# Altium PCB DIO_RJ45_DIOT.PCBDOC (part 1 of 6)
Units mil, origin at the board's own origin, x right, y up, seen from the top; angles counter-clockwise.
Board outline 8758.72 x 3941.04 mil, 4 copper layers (TopLayer, MidLayer1, Internal Plane 1, BottomLayer), stack 46.562 mil thick; 318 components, 196 nets, 1276 pads, 687 vias.
Unrouted connection lines stored in the file: 2.
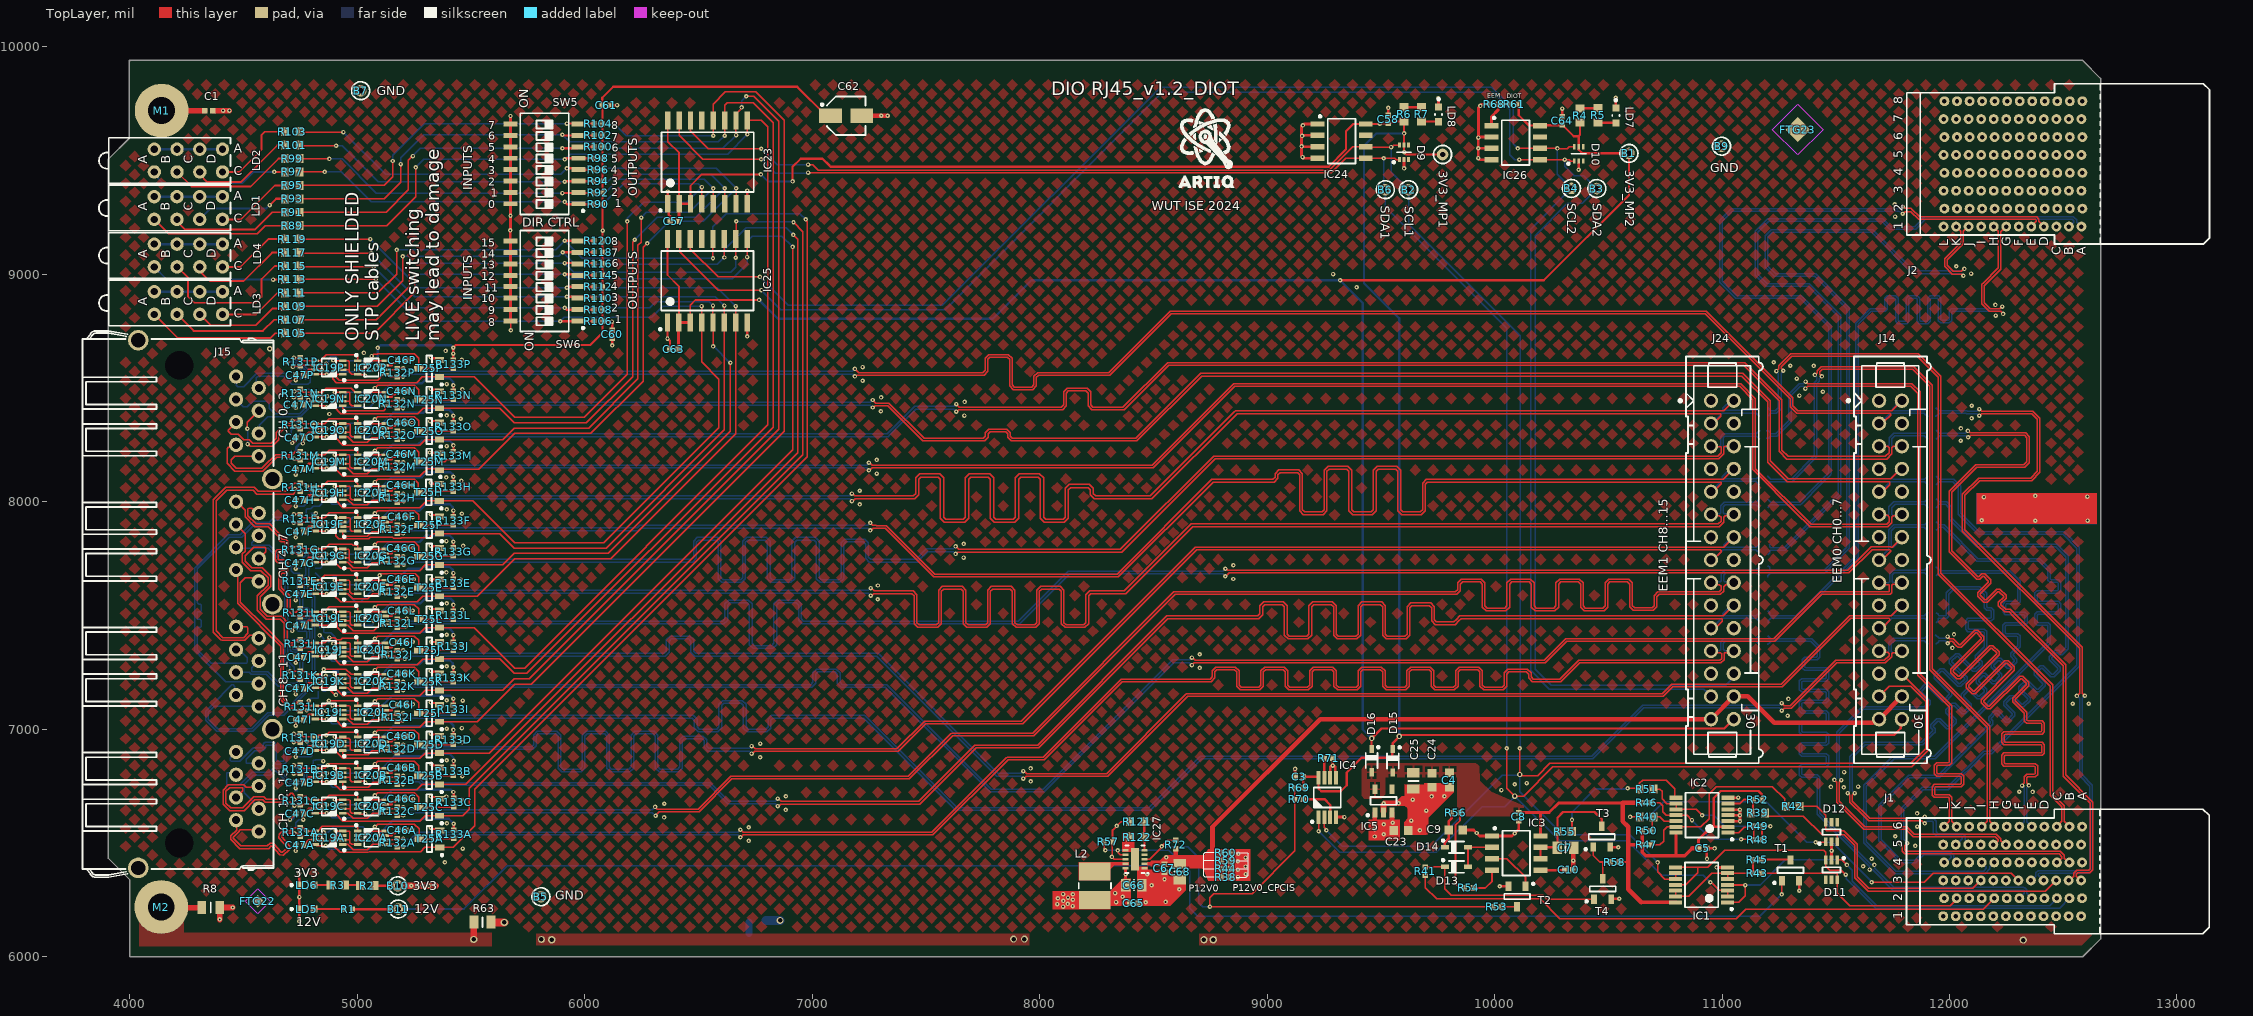
[diagram p0: TopLayer view]
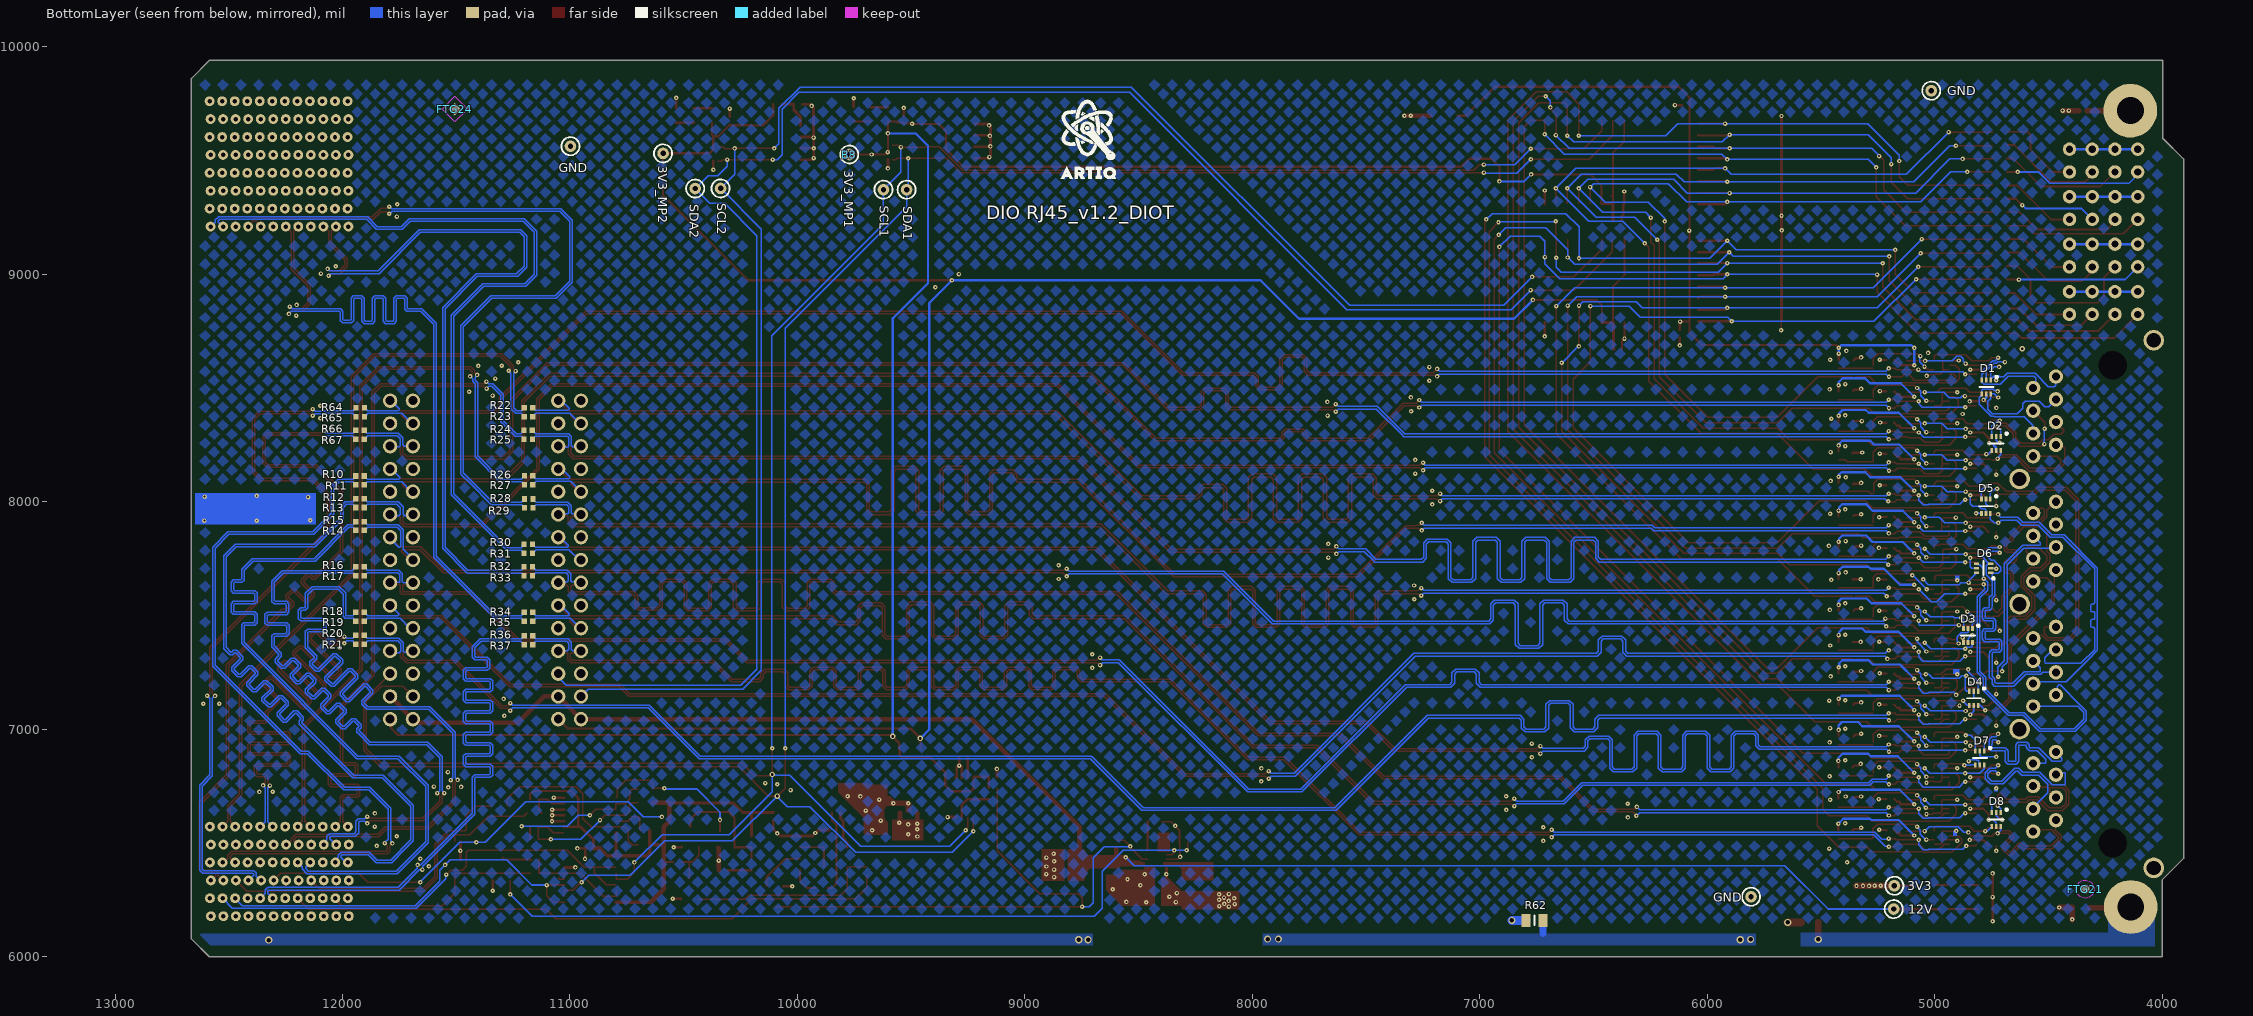
[diagram p1: BottomLayer view, seen from below]
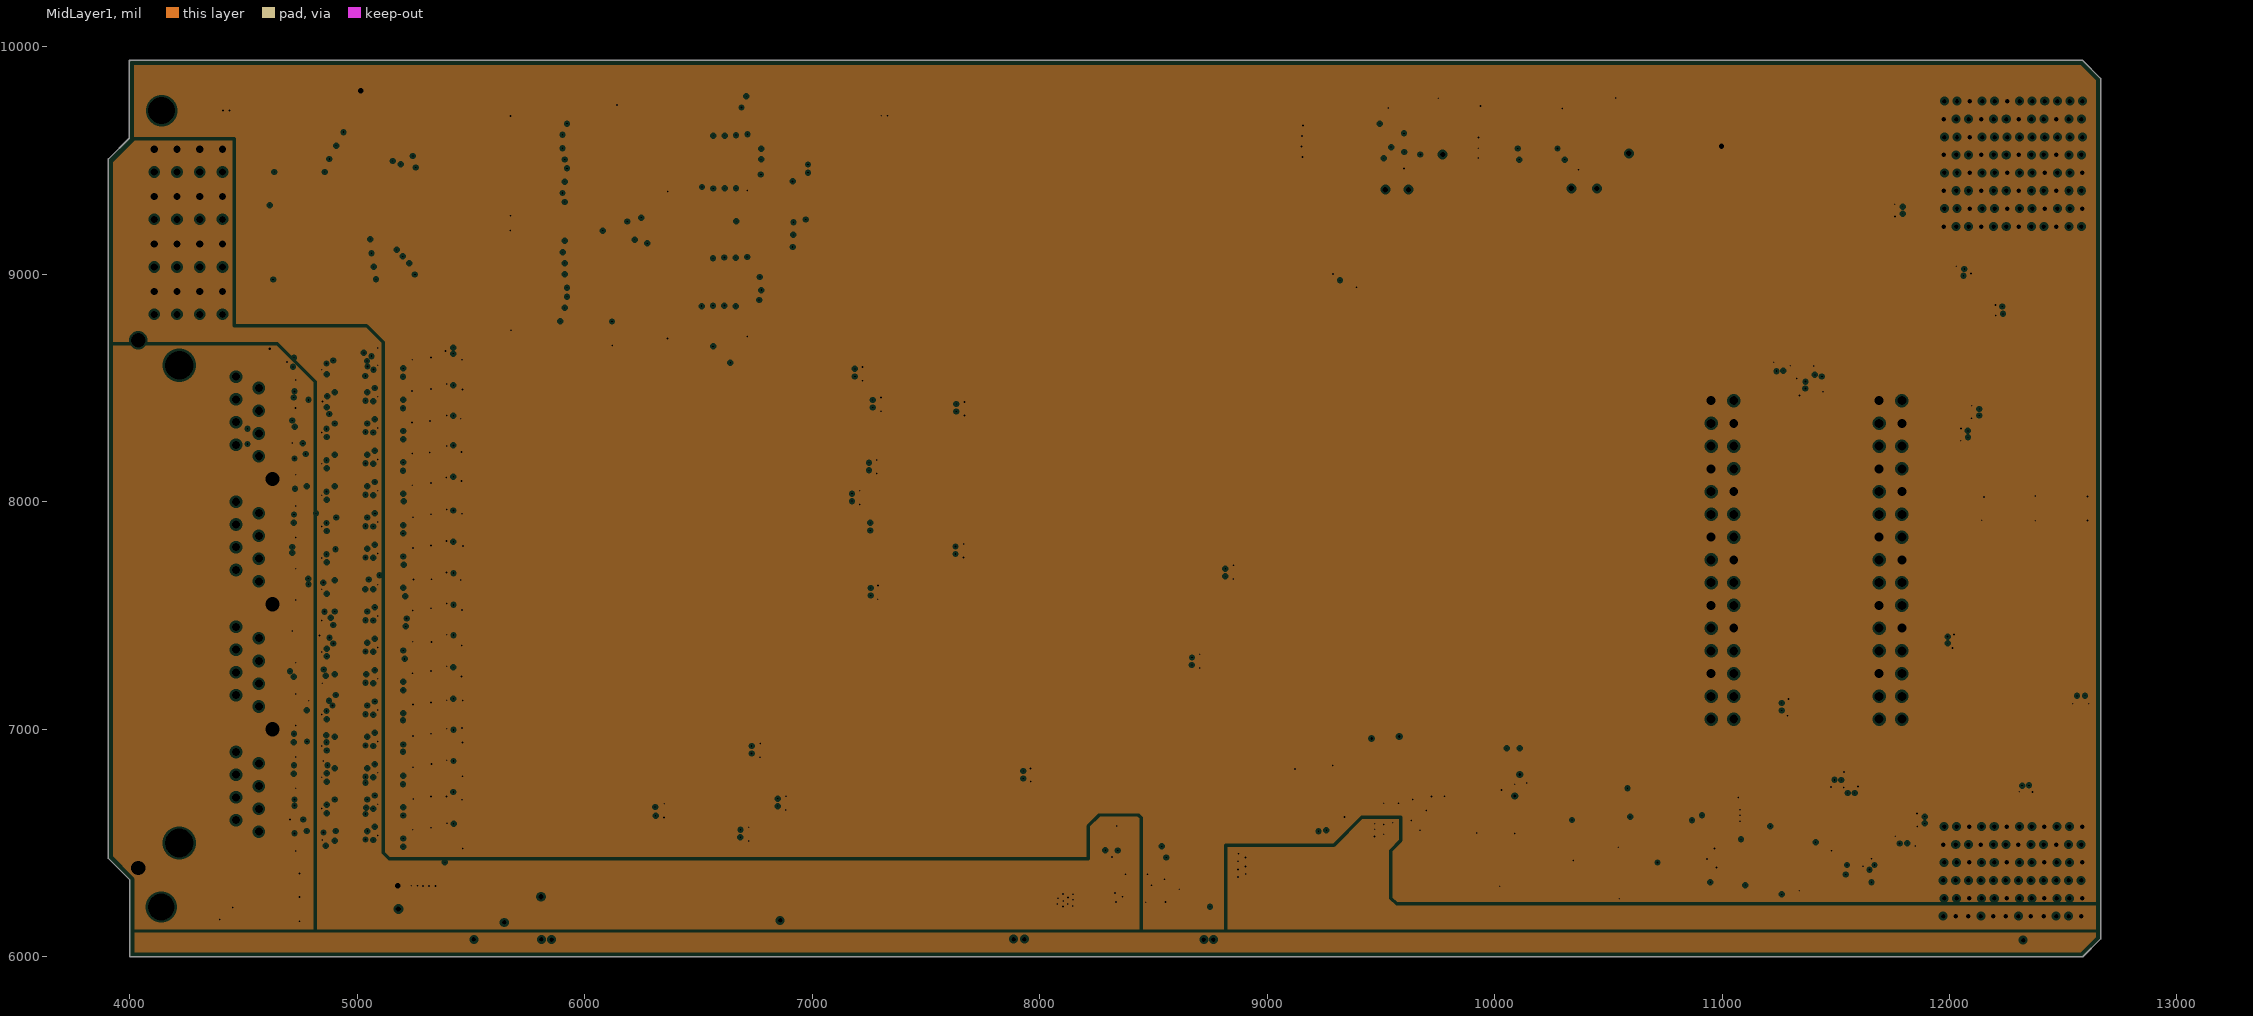
[diagram p2: MidLayer1, clearances drawn from the general rule]
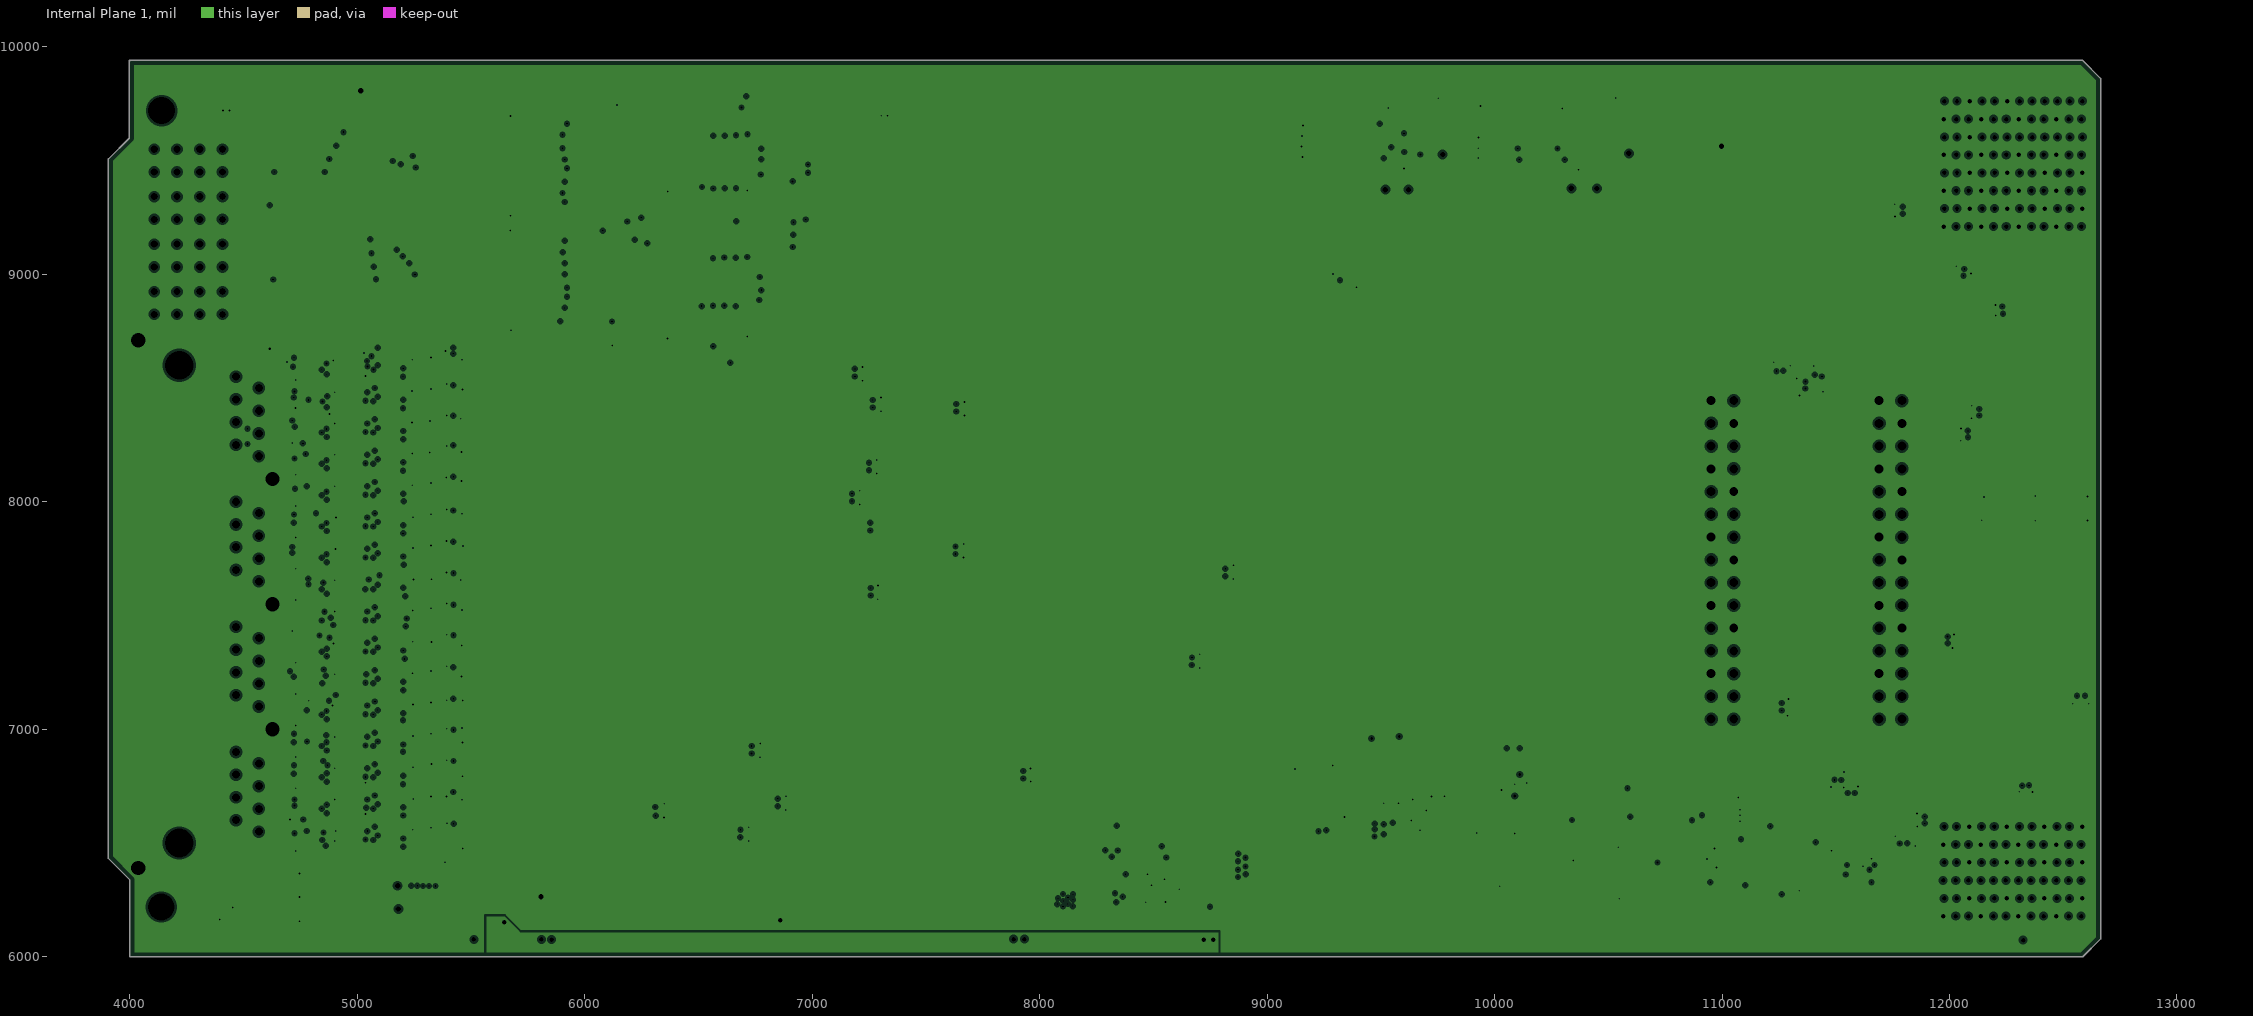
[diagram p3: Internal Plane 1, clearances drawn from the general rule]

## Layer stack, top to bottom
TopSolder: solder mask 2.087, Solder Resist, Dk 3.5
TopLayer: signal copper 1.4
Dielectric1: core 14.1728, FR-4, Dk 4.8
MidLayer1: plane copper 1.4, net (Multiple Nets)
Dielectric4: dielectric 12.6, FR-4, Dk 4.8
Internal Plane 1: plane copper 1.4169, net (Multiple Nets)
Dielectric2: core 14.1728, FR-4, Dk 4.2
BottomLayer: signal copper 1.4
BottomSolder: solder mask 2.087, Solder Resist, Dk 3.5

## Board outline
3906.25,9474.22 3906.25,9504.72 3906.84,9506.14 3998.02,9597.32 3998.02,9933.03 3999.8,9935 cw(c4000.01,9937.01) 4000.01,9939.02 12584.21,9939.02 12585.64,9938.43 12664.37,9859.71 12664.97,9858.28 12664.97,6078.73 12664.37,6077.3 12585.64,5998.58 12584.21,5997.98 4002.95,5997.98 4000.97,6000.35 4000.97,6306.73 4000.94,6307.09 4000.94,6336.76 3906.84,6430.86 3906.28,6432.64

## Design rules (kind name [scope] priority, off if disabled: settings)
AcuteAngle [All] p1: minimum=4.50000000000000E+0001 checktracksonly=FALSE
AssemblyTestPointUsage [All] p1 off:
AssemblyTestpoint [All] p1 off: testpointundercomponent=TRUE minsize=40 maxsize=100 preferedsize=60 minholesize=0 maxholesize=40 preferedholesize=32 testpointgrid=1 usegrid=TRUE gridtolerance=0.01 allowsidetop=TRUE allowsidebottom=TRUE
BoardOutlineClearance [All] p1: gap=15.75 ignorepadtopadclearanceinfootprint=FALSE
Clearance Clearance_copper_bal_bot [InNamedPolygon('copper_balance_bot')] p1: gap=5 ignorepadtopadclearanceinfootprint=FALSE
Clearance Clearance_copper_bal_top [InNamedPolygon('copper_balance_top')] p2: gap=5 ignorepadtopadclearanceinfootprint=FALSE
Clearance "Clearance FTG" [InComponent('FTG22') or InComponent('FTG23') or InComponent('FTG24')] p3: gap=0 ignorepadtopadclearanceinfootprint=TRUE
Clearance Clearance_diff_via [IsVia vs IsVia] p4: gap=5 ignorepadtopadclearanceinfootprint=FALSE
Clearance Clearance_outer [OnLayer('TopLayer') or OnLayer('BottomLayer')] p5: gap=5 ignorepadtopadclearanceinfootprint=TRUE
Clearance Clearance_inner [(OnLayer('MidLayer1'))] p6: gap=5 ignorepadtopadclearanceinfootprint=FALSE
ComponentClearance ComponentClearance_2 [InComponent('J15') or InComponent('ST1') or InComponent('LD1') or InComponent('LD2') or  InComponent('LD3') or InComponent('LD4')] p1: gap=0 collisioncheckmode=3 verticalgap=100000 showdistances=FALSE donotcheckwithout3dbody=TRUE
ComponentClearance [All] p2: gap=10 collisioncheckmode=3 verticalgap=10 showdistances=FALSE
DiffPairsRouting DiffPairsRouting_100_Ohm [InDifferentialPairClass('All Differential Pairs')] p1: maxlimit=10 minlimit=5 mostfreqgap=6 toplayer_minwidth=5 toplayer_maxwidth=6 toplayer_prefwidth=6 bottomlayer_minwidth=5 bottomlayer_maxwidth=6 bottomlayer_prefwidth=6 maxuncoupledlength=2000
FabricationTestPointUsage TestPointUsage [All] p1: valid=0 allowmultiple=FALSE
FabricationTestpoint Testpoint [All] p1: side=3 testpointundercomponent=TRUE minsize=40 maxsize=100 preferedsize=60 minholesize=20 maxholesize=40 preferedholesize=32 testpointgrid=1 allowsidetop=TRUE allowsidebottom=TRUE usegrid=TRUE gridtolerance=0.01
Height Height_1 [OnLayer('BottomLayer')] p1: minheight=0 maxheight=78.74 prefheight=39.37
Height [All] p2: minheight=0 maxheight=1000 prefheight=500
HoleSize [All] p1: absolutevalues=TRUE maxlimit=125.98 minlimit=5.91 maxpercent=80.000 minpercent=20.000
HoleToHoleClearance [All] p1: gap=5.91 allowstackedmicrovias=TRUE
MatchedLengths xSignals_RJ45_A_1 [InxSignalClass('LVDS_RJ45_A')] p1: tolerance=1000 checknetsindiffpair=FALSE checkdiffpairvsdiffpair=TRUE checkxsignals=TRUE checkothers=TRUE usedelayunits=TRUE delaytolerance=10.000000
MatchedLengths xSignals_RJ45_D_1 [InxSignalClass('LVDS_RJ45_D')] p2: tolerance=1000 checknetsindiffpair=FALSE checkdiffpairvsdiffpair=TRUE checkxsignals=TRUE checkothers=TRUE usedelayunits=TRUE delaytolerance=10.000000
MatchedLengths xSignals_RJ45_C_1 [InxSignalClass('LVDS_RJ45_C')] p3: tolerance=1000 checknetsindiffpair=FALSE checkdiffpairvsdiffpair=TRUE checkxsignals=TRUE checkothers=TRUE usedelayunits=TRUE delaytolerance=10.000000
MatchedLengths xSignals_RJ45_B_1 [InxSignalClass('LVDS_RJ45_B')] p4: tolerance=1000 checknetsindiffpair=FALSE checkdiffpairvsdiffpair=TRUE checkxsignals=TRUE checkothers=TRUE usedelayunits=TRUE delaytolerance=10.000000
MatchedLengths xSignals_RJ45_A_2 [InxSignalClass('LVDS_RJ45_A')] p5: tolerance=1000 checknetsindiffpair=TRUE checkdiffpairvsdiffpair=FALSE checkxsignals=FALSE checkothers=FALSE usedelayunits=TRUE delaytolerance=5.000000
MatchedLengths xSignals_RJ45_D_2 [InxSignalClass('LVDS_RJ45_D')] p6: tolerance=1000 checknetsindiffpair=TRUE checkdiffpairvsdiffpair=FALSE checkxsignals=FALSE checkothers=FALSE usedelayunits=TRUE delaytolerance=5.000000
MatchedLengths xSignals_RJ45_C_2 [InxSignalClass('LVDS_RJ45_C')] p7: tolerance=1000 checknetsindiffpair=TRUE checkdiffpairvsdiffpair=FALSE checkxsignals=FALSE checkothers=FALSE usedelayunits=TRUE delaytolerance=5.000000
MatchedLengths xSignals_RJ45_B_2 [InxSignalClass('LVDS_RJ45_B')] p8: tolerance=1000 checknetsindiffpair=TRUE checkdiffpairvsdiffpair=FALSE checkxsignals=FALSE checkothers=FALSE usedelayunits=TRUE delaytolerance=5.000000
MatchedLengths xSignals_EEM [InxSignalClass('EEM_LVDS')] p9: tolerance=1000 checknetsindiffpair=FALSE checkdiffpairvsdiffpair=TRUE checkxsignals=TRUE checkothers=TRUE usedelayunits=TRUE delaytolerance=10.000000
MatchedLengths xSignals_BP [InxSignalClass('BP_LVDS')] p10: tolerance=1000 checknetsindiffpair=FALSE checkdiffpairvsdiffpair=TRUE checkxsignals=TRUE checkothers=TRUE usedelayunits=TRUE delaytolerance=10.000000
MatchedLengths xSignals_BP_1 [InxSignalClass('BP_LVDS')] p11: tolerance=1000 checknetsindiffpair=TRUE checkdiffpairvsdiffpair=FALSE checkxsignals=FALSE checkothers=FALSE usedelayunits=TRUE delaytolerance=5.000000
MatchedLengths xSignals_EEM_1 [InxSignalClass('EEM_LVDS')] p12: tolerance=1000 checknetsindiffpair=TRUE checkdiffpairvsdiffpair=FALSE checkxsignals=FALSE checkothers=FALSE usedelayunits=TRUE delaytolerance=5.000000
MatchedLengths [InDifferentialPairClass('All Differential Pairs')] p13: tolerance=1000 checknetsindiffpair=TRUE checkdiffpairvsdiffpair=FALSE checkxsignals=FALSE checkothers=FALSE usedelayunits=TRUE delaytolerance=10.000000
MinimumSolderMaskSliver [All] p1: minsoldermaskwidth=3.94
ParallelSegment [All] p1 off: limit=196.85 gap=10
PasteMaskExpansion [All] p1 off: expansion=0
PlaneClearance [All] p1: clearance=10
PlaneConnect PlaneConnect_1 [HasCompParameterValue('PressFit', 'Yes')] p1: planeconnectstyle=Direct reliefexpansion=7.87 reliefentries=4 reliefconductorwidth=10 reliefairgap=10
PlaneConnect [All] p2: pad.planeconnectstyle=Relief pad.reliefexpansion=7.87 pad.reliefentries=4 pad.reliefconductorwidth=10 pad.reliefairgap=10 via.planeconnectstyle=Direct via.reliefexpansion=7.87 via.reliefentries=4 via.reliefconductorwidth=10 via.reliefairgap=5.91
PolygonConnect PolygonConnect_4 [All vs IsNamedPolygon('esd1')] p1: connectstyle=Direct reliefconductorwidth=10 reliefentries=4 polygonreliefangle="90 Angle" airgapwidth=10
PolygonConnect PolygonConnect_3 [HasFootprint('AMPHENOL_10052825-101LF')] p2: thpad.connectstyle=Direct thpad.reliefconductorwidth=10 thpad.reliefentries=4 thpad.polygonreliefangle="90 Angle" thpad.airgapwidth=10 smdpad.connectstyle=Relief smdpad.reliefconductorwidth=10 smdpad.reliefentries=4 smdpad.polygonreliefangle="90 Angle" smdpad.airgapwidth=10 via.connectstyle=Relief via.reliefconductorwidth=10 via.reliefentries=4 via.polygonreliefangle="90 Angle" via.airgapwidth=10
PolygonConnect PolygonConnect_1 [InPolygonClass('Direct')] p3: connectstyle=Direct reliefconductorwidth=10 reliefentries=2 polygonreliefangle="45 Angle" airgapwidth=10
PolygonConnect PolygonConnect_2 [InNetClass('PWR')] p4: thpad.connectstyle=Relief thpad.reliefconductorwidth=19.68 thpad.reliefentries=4 thpad.polygonreliefangle="90 Angle" thpad.airgapwidth=10 smdpad.connectstyle=Relief smdpad.reliefconductorwidth=19.68 smdpad.reliefentries=4 smdpad.polygonreliefangle="90 Angle" smdpad.airgapwidth=9.84 via.connectstyle=Direct via.reliefconductorwidth=10 via.reliefentries=2 via.polygonreliefangle="90 Angle" via.airgapwidth=10
PolygonConnect [All] p5: thpad.connectstyle=Relief thpad.reliefconductorwidth=10 thpad.reliefentries=4 thpad.polygonreliefangle="90 Angle" thpad.airgapwidth=10 smdpad.connectstyle=Relief smdpad.reliefconductorwidth=10 smdpad.reliefentries=4 smdpad.polygonreliefangle="90 Angle" smdpad.airgapwidth=10 via.connectstyle=Direct via.reliefconductorwidth=10 via.reliefentries=4 via.polygonreliefangle="90 Angle" via.airgapwidth=10
RoomDefinition U_LVDS_repeater16 [InComponentClass('U_LVDS_repeater16')] p1 off: confinementstyle=ConfineIn formatcopy=TRUE lockcomponents=FALSE outline 0,0 2000,0 2000,1000 0,1000
RoomDefinition U_LVDS_repeater15 [InComponentClass('U_LVDS_repeater15')] p2 off: confinementstyle=ConfineIn formatcopy=TRUE lockcomponents=FALSE outline 0,0 2000,0 2000,1000 0,1000
RoomDefinition U_LVDS_repeater14 [InComponentClass('U_LVDS_repeater14')] p3 off: confinementstyle=ConfineIn formatcopy=TRUE lockcomponents=FALSE outline 0,0 2000,0 2000,1000 0,1000
RoomDefinition U_LVDS_repeater13 [InComponentClass('U_LVDS_repeater13')] p4 off: confinementstyle=ConfineIn formatcopy=TRUE lockcomponents=FALSE outline 0,0 2000,0 2000,1000 0,1000
RoomDefinition U_LVDS_repeater12 [InComponentClass('U_LVDS_repeater12')] p5 off: confinementstyle=ConfineIn formatcopy=TRUE lockcomponents=FALSE outline 0,0 2000,0 2000,1000 0,1000
RoomDefinition U_LVDS_repeater11 [InComponentClass('U_LVDS_repeater11')] p6 off: confinementstyle=ConfineIn formatcopy=TRUE lockcomponents=FALSE outline 0,0 2000,0 2000,1000 0,1000
RoomDefinition U_LVDS_repeater10 [InComponentClass('U_LVDS_repeater10')] p7 off: confinementstyle=ConfineIn formatcopy=TRUE lockcomponents=FALSE outline 0,0 2000,0 2000,1000 0,1000
RoomDefinition U_LVDS_repeater9 [InComponentClass('U_LVDS_repeater9')] p8 off: confinementstyle=ConfineIn formatcopy=TRUE lockcomponents=FALSE outline 0,0 2000,0 2000,1000 0,1000
RoomDefinition U_LVDS_repeater8 [InComponentClass('U_LVDS_repeater8')] p9 off: confinementstyle=ConfineIn formatcopy=TRUE lockcomponents=FALSE outline 0,0 2000,0 2000,1000 0,1000
RoomDefinition U_LVDS_repeater7 [InComponentClass('U_LVDS_repeater7')] p10 off: confinementstyle=ConfineIn formatcopy=TRUE lockcomponents=FALSE outline 0,0 2000,0 2000,1000 0,1000
RoomDefinition U_LVDS_repeater6 [InComponentClass('U_LVDS_repeater6')] p11 off: confinementstyle=ConfineIn formatcopy=TRUE lockcomponents=FALSE outline 0,0 2000,0 2000,1000 0,1000
RoomDefinition U_LVDS_repeater5 [InComponentClass('U_LVDS_repeater5')] p12 off: confinementstyle=ConfineIn formatcopy=TRUE lockcomponents=FALSE outline 0,0 2000,0 2000,1000 0,1000
RoomDefinition U_LVDS_repeater4 [InComponentClass('U_LVDS_repeater4')] p13 off: confinementstyle=ConfineIn formatcopy=TRUE lockcomponents=FALSE outline 0,0 2000,0 2000,1000 0,1000
RoomDefinition U_LVDS_repeater3 [InComponentClass('U_LVDS_repeater3')] p14 off: confinementstyle=ConfineIn formatcopy=TRUE lockcomponents=FALSE outline 0,0 2000,0 2000,1000 0,1000
RoomDefinition U_LVDS_repeater2 [InComponentClass('U_LVDS_repeater2')] p15 off: confinementstyle=ConfineIn formatcopy=TRUE lockcomponents=FALSE outline 0,0 2000,0 2000,1000 0,1000
RoomDefinition U_LVDS_repeater1 [InComponentClass('U_LVDS_repeater1')] p16 off: confinementstyle=ConfineIn formatcopy=TRUE lockcomponents=FALSE outline 0,0 2000,0 2000,1000 0,1000
RoutingLayers RoutingLayers_1 [InAnyDifferentialPair] p1: top layer_v5=TRUE bottom layer_v5=TRUE
RoutingLayers RoutingLayers_2 [InNetClass('50Ohm')] p2: top layer_v5=TRUE bottom layer_v5=TRUE
RoutingLayers [All] p3: top layer_v5=TRUE bottom layer_v5=TRUE
RoutingVias [All] p1: holewidth=7.87 width=19.68 viastyle="Through Hole" minholewidth=7.87 minwidth=19.68 maxholewidth=20 maxwidth=40
SMDEntry [All] p1 off: side=TRUE corner=TRUE anyangle=FALSE
SilkToSilkClearance [All] p1: silktosilkclearance=5.91
SilkToSolderMaskClearance SilkscreenOverComponentPads [IsPad] p1: minsilkscreentomaskgap=0.7 clearancetoexposedcopper=FALSE
SolderMaskExpansion SolderMaskExpansion_1 [IsVia] p1 off: expansion=1.97 istentingtop=TRUE
SolderMaskExpansion [All] p2 off: expansion=1.97 istentingtop=FALSE
StubLength [All] p1: limit=118.11
SupplyNets "Schematic Supply Nets_2" [InNet('STRIP1')] p1: voltage=0.000
SupplyNets "Schematic Supply Nets_10" [InNet('P3V3_CPCIS')] p2 off: voltage=0.000
SupplyNets "Schematic Supply Nets_7" [InNet('P12V0_CPCIS')] p3 off: voltage=0.000
SupplyNets "Schematic Supply Nets_6" [InNet('GND')] p4 off: voltage=0.000
SupplyNets "Schematic Supply Nets_4" [InNet('P3V3')] p5 off: voltage=0.000
SupplyNets "Schematic Supply Nets_3" [InNet('P3V3_MP1')] p6 off: voltage=0.000
SupplyNets "Schematic Supply Nets_1" [InNet('P12V0')] p7 off: voltage=0.000
SupplyNets "Schematic Supply Nets" [InNet('P3V3_MP2')] p8 off: voltage=0.000
UnConnectedPin [All] p1 off:
UnRoutedNet UnRoutedNet_1 [Not InNet('STRIP1')] p2:
UnpouredPolygon UnpouredPolygon_1 [InPolygonClass('Copper_Balancing')] p1: allowunpoured=TRUE
UnpouredPolygon [All] p2:
ViasUnderSMD [All] p1: allowed=TRUE
Width Width_pwr [InNetClass('PWR')] p1: maxlimit=78.74 minlimit=5.98 preferedwidth=11.81 minimp=50.000000 maximp=50.000000 favimp=50.000000
Width Width_50Ohm [InNetClass('50Ohm')] p2: maxlimit=6.56 minlimit=6.56 preferedwidth=6.56 minimp=50.000000 maximp=50.000000 favimp=50.000000
Width [All] p3: maxlimit=78.74 minlimit=5.98 preferedwidth=5.98 minimp=50.000000 maximp=50.000000 favimp=50.000000
13 further rules are at their usual default settings.

## Classes and differential pairs
component class U_Supply: C3 C19 C20 C21 C22 C23 C24 C25 C60 C61 C62 C65 C66 C67 C68 D15 D16 IC4 IC5 IC27 L2 LD5 LD6 LD7 LD8 R1 R2 R3 R4 R5 R6 R7 R38 R44 R57 R59 R60 R69 R70 R71 R72 R121 R122
component class U_EEM_Connectors: C4 IC1 J14 J24 R10 R11 R12 R13 R14 R15 R16 R17 R18 R19 R20 R21 R22 R23 R24 R25 R26 R27 R28 R29 R30 R31 R32 R33 R34 R35 R36 R37 R64 R65 R66 R67
component class U_CPCIS_Connectors: C5 C7 C8 C9 C10 D11 D12 D13 D14 IC2 IC3 J1 J2 R39 R40 R41 R42 R43 R45 R46 R47 R48 R49 R50 R51 R52 R53 R54 R55 R56 R58 T1 T2 T3 T4
component class DIO45_TOP: C1 M1 M2 R8 R62 R63
channel class LVDS_repeater: U_LVDS_repeater1 U_LVDS_repeater2 U_LVDS_repeater3 U_LVDS_repeater4 U_LVDS_repeater5 U_LVDS_repeater6 U_LVDS_repeater7 U_LVDS_repeater8 U_LVDS_repeater9 U_LVDS_repeater10 U_LVDS_repeater11 U_LVDS_repeater12 U_LVDS_repeater13 U_LVDS_repeater14 U_LVDS_repeater15 U_LVDS_repeater16
component class U_LVDS_repeater16: C46P C47P IC19P IC20P R131P R132P R133P T25P
component class U_LVDS_repeater15: C46O C47O IC19O IC20O R131O R132O R133O T25O
component class U_LVDS_repeater14: C46N C47N IC19N IC20N R131N R132N R133N T25N
component class U_LVDS_repeater13: C46M C47M IC19M IC20M R131M R132M R133M T25M
component class U_LVDS_repeater12: C46L C47L IC19L IC20L R131L R132L R133L T25L
component class U_LVDS_repeater11: C46K C47K IC19K IC20K R131K R132K R133K T25K
component class U_LVDS_repeater10: C46J C47J IC19J IC20J R131J R132J R133J T25J
component class U_LVDS_repeater9: C46I C47I IC19I IC20I R131I R132I R133I T25I
component class U_LVDS_repeater8: C46H C47H IC19H IC20H R131H R132H R133H T25H
component class U_LVDS_repeater7: C46G C47G IC19G IC20G R131G R132G R133G T25G
component class U_LVDS_repeater6: C46F C47F IC19F IC20F R131F R132F R133F T25F
component class U_LVDS_repeater5: C46E C47E IC19E IC20E R131E R132E R133E T25E
component class U_LVDS_repeater4: C46D C47D IC19D IC20D R131D R132D R133D T25D
component class U_LVDS_repeater3: C46C C47C IC19C IC20C R131C R132C R133C T25C
component class U_LVDS_repeater2: C46B C47B IC19B IC20B R131B R132B R133B T25B
component class U_LVDS_repeater1: C46A C47A IC19A IC20A R131A R132A R133A T25A
component class U_Input: B1 B2 B3 B4 B5 B6 B7 B8 B9 B10 B11 C57 C58 C63 C64 D1 D2 D3 D4 D5 D6 D7 D8 D9 D10 FTG21 FTG22 FTG23 FTG24 IC23 IC24 IC25 IC26 J15 LD1 LD2 LD3 LD4 R61 R68 R89 R90 R91 R92 R93 R94 R95 R96 R97 R98 R99 R100 R101 R102 R103 R104 R105 R106 R107 R108 R109 R110 R111 R112 R113 R114 R115 R116 R117 R118 R119 R120 SW5 SW6
differential pair BP_IO.BP_LVDS15: +BP_IO.BP_LVDS15_P -BP_IO.BP_LVDS15_N
differential pair BP_IO.BP_LVDS14: +BP_IO.BP_LVDS14_P -BP_IO.BP_LVDS14_N
differential pair BP_IO.BP_LVDS13: +BP_IO.BP_LVDS13_P -BP_IO.BP_LVDS13_N
differential pair BP_IO.BP_LVDS12: +BP_IO.BP_LVDS12_P -BP_IO.BP_LVDS12_N
differential pair BP_IO.BP_LVDS11: +BP_IO.BP_LVDS11_P -BP_IO.BP_LVDS11_N
differential pair BP_IO.BP_LVDS10: +BP_IO.BP_LVDS10_P -BP_IO.BP_LVDS10_N
differential pair BP_IO.BP_LVDS9: +BP_IO.BP_LVDS9_P -BP_IO.BP_LVDS9_N
differential pair BP_IO.BP_LVDS8: +BP_IO.BP_LVDS8_P -BP_IO.BP_LVDS8_N
differential pair BP_IO.BP_LVDS7: +BP_IO.BP_LVDS7_P -BP_IO.BP_LVDS7_N
differential pair BP_IO.BP_LVDS6: +BP_IO.BP_LVDS6_P -BP_IO.BP_LVDS6_N
differential pair BP_IO.BP_LVDS5: +BP_IO.BP_LVDS5_P -BP_IO.BP_LVDS5_N
differential pair BP_IO.BP_LVDS4: +BP_IO.BP_LVDS4_P -BP_IO.BP_LVDS4_N
differential pair BP_IO.BP_LVDS3: +BP_IO.BP_LVDS3_P -BP_IO.BP_LVDS3_N
differential pair BP_IO.BP_LVDS2: +BP_IO.BP_LVDS2_P -BP_IO.BP_LVDS2_N
differential pair BP_IO.BP_LVDS1: +BP_IO.BP_LVDS1_P -BP_IO.BP_LVDS1_N
differential pair BP_IO.BP_LVDS0: +BP_IO.BP_LVDS0_P -BP_IO.BP_LVDS0_N
differential pair LVDS15: +LVDS15_P -LVDS15_N
differential pair LVDS0: +LVDS0_P -LVDS0_N
differential pair LVDS2: +LVDS1_P -LVDS1_N
differential pair LVDS3: +LVDS2_P -LVDS2_N
differential pair LVDS4: +LVDS3_P -LVDS3_N
differential pair LVDS5: +LVDS4_P -LVDS4_N
differential pair LVDS6: +LVDS5_P -LVDS5_N
differential pair LVDS7: +LVDS6_P -LVDS6_N
differential pair LVDS8: +LVDS7_P -LVDS7_N
differential pair LVDS10: +LVDS9_P -LVDS9_N
differential pair LVDS11: +LVDS10_P -LVDS10_N
differential pair LVDS12: +LVDS11_P -LVDS11_N
differential pair LVDS13: +LVDS12_P -LVDS12_N
differential pair LVDS14: +LVDS13_P -LVDS13_N
differential pair LVDS15: +LVDS14_P -LVDS14_N
differential pair LVDS_IOAA: +LVDS_IOAA_P -LVDS_IOAA_N
differential pair LVDS_IOAB: +LVDS_IOAB_P -LVDS_IOAB_N
differential pair LVDS_IOAC: +LVDS_IOAC_P -LVDS_IOAC_N
differential pair LVDS_IOAD: +LVDS_IOAD_P -LVDS_IOAD_N
differential pair LVDS_IOAE: +LVDS_IOAE_P -LVDS_IOAE_N
differential pair LVDS_IOAF: +LVDS_IOAF_P -LVDS_IOAF_N
differential pair LVDS_IOAG: +LVDS_IOAG_P -LVDS_IOAG_N
differential pair LVDS_IOAH: +LVDS_IOAH_P -LVDS_IOAH_N
differential pair LVDS_IOAI: +LVDS_IOAI_P -LVDS_IOAI_N
differential pair LVDS_IOAJ: +LVDS_IOAJ_P -LVDS_IOAJ_N
differential pair LVDS_IOAK: +LVDS_IOAK_P -LVDS_IOAK_N
differential pair LVDS_IOAL: +LVDS_IOAL_P -LVDS_IOAL_N
differential pair LVDS_IOAM: +LVDS_IOAM_P -LVDS_IOAM_N
differential pair LVDS_IOAN: +LVDS_IOAN_P -LVDS_IOAN_N
differential pair LVDS_IOAO: +LVDS_IOAO_P -LVDS_IOAO_N
differential pair LVDS_IOAP: +LVDS_IOAP_P -LVDS_IOAP_N
differential pair LVDS9: +LVDS8_P -LVDS8_N

## Components (designator, comment, footprint, x,y, rotation, side; value= is the part's Value field where it differs from the comment)
B1 "Plated Hole" c130h60 10590.85,9530.51 r0 top
B2 "Plated Hole" c130h60 9621.98,9371.06 r0 top
B3 "Plated Hole" c130h60 10449.8,9375.98 r0 top
B4 "Plated Hole" c130h60 10338.09,9376.48 r0 top
B5 "Plated Hole" c130h60 5808.07,6262.8 r0 top
B6 "Plated Hole" c130h60 9520.24,9371.06 r0 top
B7 "Plated Hole" c130h60 5015.75,9806.1 r0 top
B8 "Plated Hole" c130h60 9771.65,9525.59 r180 bottom
B9 "Plated Hole" c130h60 10998.03,9562.01 r0 top
B10 "Plated Hole" c130h60 5178.15,6311.02 r0 top
B11 "Plated Hole" c130h60 5181.1,6208.66 r0 top
C1 "22pF" CAPC1005X55N 4347.85,9718.5 r0 top
C3 "100nF" CAPC1005X55N 9140.75,6790.35 r0 top
C4 "100nF" CAPC1608X87N 9801.18,6775.59 r90 top
C5 "100nF" CAPC1005X55N 10914.37,6476.38 r180 top
C7 "22uF" CAPC2012X135N 10312.01,6478.35 r180 top
C8 "100nF" CAPC1005X55N 10106.33,6615.06 r90 top
C9 "1uF" CAPC1608X87N 9829.7,6556.07 r180 top
C10 "100nF" CAPC1005X55N 10325.79,6380.91 r180 top
C23 "1uF" CAPC1608X87N 9588.58,6553.15 r180 top
C24 "1uF" CAPC1608X87N 9725.39,6774.61 r90 top
C25 "22uF" CAPC2012X135N 9643.7,6771.65 r90 top
C46A "100nF" CAPC1005X55N 5196.13,6555.04 r180 top (schematic designator C46)
C46B "100nF" CAPC1005X55N 5196.13,6830.63 r180 top (schematic designator C46)
C46C "100nF" CAPC1005X55N 5196.13,6692.83 r180 top (schematic designator C46)
C46D "100nF" CAPC1005X55N 5196.13,6968.43 r180 top (schematic designator C46)
C46E "100nF" CAPC1005X55N 5196.13,7657.4 r180 top (schematic designator C46)
C46F "100nF" CAPC1005X55N 5196.13,7932.99 r180 top (schematic designator C46)
C46G "100nF" CAPC1005X55N 5196.13,7795.2 r180 top (schematic designator C46)
C46H "100nF" CAPC1005X55N 5196.13,8070.79 r180 top (schematic designator C46)
C46I "100nF" CAPC1005X55N 5196.13,7106.22 r180 top (schematic designator C46)
C46J "100nF" CAPC1005X55N 5196.13,7381.81 r180 top (schematic designator C46)
C46K "100nF" CAPC1005X55N 5196.13,7244.02 r180 top (schematic designator C46)
C46L "100nF" CAPC1005X55N 5196.13,7519.61 r180 top (schematic designator C46)
C46M "100nF" CAPC1005X55N 5196.13,8208.58 r180 top (schematic designator C46)
C46N "100nF" CAPC1005X55N 5196.13,8484.17 r180 top (schematic designator C46)
C46O "100nF" CAPC1005X55N 5196.13,8346.38 r180 top (schematic designator C46)
C46P "100nF" CAPC1005X55N 5196.13,8621.97 r180 top (schematic designator C46)
C47A "100nF" CAPC1005X55N 4747.13,6489.2 r0 top (schematic designator C47)
C47B "100nF" CAPC1005X55N 4747.13,6764.79 r0 top (schematic designator C47)
C47C "100nF" CAPC1005X55N 4747.13,6626.99 r0 top (schematic designator C47)
C47D "100nF" CAPC1005X55N 4747.13,6902.58 r0 top (schematic designator C47)
C47E "100nF" CAPC1005X55N 4747.13,7591.56 r0 top (schematic designator C47)
C47F "100nF" CAPC1005X55N 4747.13,7867.15 r0 top (schematic designator C47)
C47G "100nF" CAPC1005X55N 4747.13,7729.35 r0 top (schematic designator C47)
C47H "100nF" CAPC1005X55N 4747.13,8004.94 r0 top (schematic designator C47)
C47I "100nF" CAPC1005X55N 4747.13,7040.38 r0 top (schematic designator C47)
C47J "100nF" CAPC1005X55N 4747.13,7315.97 r0 top (schematic designator C47)
C47K "100nF" CAPC1005X55N 4747.13,7178.17 r0 top (schematic designator C47)
C47L "100nF" CAPC1005X55N 4747.13,7453.76 r0 top (schematic designator C47)
C47M "100nF" CAPC1005X55N 4747.13,8142.74 r0 top (schematic designator C47)
C47N "100nF" CAPC1005X55N 4744.09,8424.89 r0 top (schematic designator C47)
C47O "100nF" CAPC1005X55N 4747.13,8280.54 r0 top (schematic designator C47)
C47P "100nF" CAPC1005X55N 4747.13,8556.13 r0 top (schematic designator C47)
C57 "100nF" CAPC1005X55N 6394.69,9231.3 r0 top
C58 "100nF" CAPC1005X55N 9533.46,9680.12 r270 top
C60 "100nF" CAPC1005X55N 6121.06,8736.22 r90 top
C61 "100nF" CAPC1005X55N 6095.47,9741.14 r180 top
C62 "10uF" CAPAE430X540N 7149.61,9695.87 r0 top
C63 "100nF" CAPC1005X55N 6392.72,8669.29 r0 top
C64 "100nF" CAPC1005X55N 10298.23,9674.21 r270 top
C65 "100nF" CAPC1005X55N 8414.92,6234.54 r180 top
C66 "22uF" CAPC2012X135N 8414.92,6313.99 r180 top
C67 "100nF" CAPC1005X55N 8549.21,6388.78 r90 top
C68 "22uF" CAPC2012X135N 8616.14,6373.03 r90 top
D1 "NUP4114UPXV6T1G" SOTFL50P160X60-6N 4773.62,8503.94 r270 bottom
D2 "NUP4114UPXV6T1G" SOTFL50P160X60-6N 4730.13,8255.54 r270 bottom
D3 "NUP4114UPXV6T1G" SOTFL50P160X60-6N 4854.33,7411.42 r270 bottom
D4 "NUP4114UPXV6T1G" SOTFL50P160X60-6N 4828.74,7134.84 r270 bottom
D5 "NUP4114UPXV6T1G" SOTFL50P160X60-6N 4775.59,7979.33 r270 bottom
D6 "NUP4114UPXV6T1G" SOTFL50P160X60-6N 4785.62,7707.23 r0 bottom
D7 "NUP4114UPXV6T1G" SOTFL50P160X60-6N 4802.17,6873.03 r270 bottom
D8 "NUP4114UPXV6T1G" SOTFL50P160X60-6N 4730.13,6601.99 r270 bottom
D9 "NUP4114UPXV6T1G" SOTFL50P160X60-6N 9602.36,9535.43 r90 top
D10 "NUP4114UPXV6T1G" SOTFL50P160X60-6N 10370.08,9528.54 r90 top
D11 "PESD3V3L5UY" SOT65P210X110-6N 11481.3,6380.91 r270 top
D12 "PESD3V3L5UY" SOT65P210X110-6N 11481.3,6547.24 r90 top
D13 "BAT165" SOD2512X110N 9832.65,6393.67 r0 top
D14 "BAT165" SOD2512X110N 9832.65,6480.28 r0 top
D15 "BAT165" SOD2512X110N 9553.15,6860.24 r270 top
D16 "BAT165" SOD2512X110N 9459.65,6861.22 r270 top
FTG21 "Use only in PCB" FIDUCIAL_TOP_C100-200 4339.57,6296.13 r90 bottom
FTG22 "Use only in PCB" FIDUCIAL_TOP_S100-200 4562.99,6243.11 r90 top
FTG23 "Use only in PCB" FIDUCIAL_TOP_S200-400 11333.66,9634.84 r0 top locked
FTG24 "Use only in PCB" FIDUCIAL_TOP_S100-200 11505.91,9725.39 r90 bottom
IC1 "74HC4066PW" SOP65P640X110-14N 10910.43,6314.96 r180 top
IC2 "74HC4066PW" SOP65P640X110-14N 10912.4,6621.06 r180 top
IC3 "TLC555ID" SOIC127P600X175-8N 10095.47,6454.72 r0 top
IC4 "LM75AIMM/NOPB" SOP65P490X109-8N 9264.76,6698.82 r90 top
IC5 "MIC5219-3.3YM5" SOT95P280X145-5N 9511.81,6684.06 r90 top
IC19A "FIN1101K8X" SOP50P310X90-8N 4876.13,6522.04 r180 top (schematic designator IC19)
IC19B "FIN1101K8X" SOP50P310X90-8N 4876.13,6797.63 r180 top (schematic designator IC19)
IC19C "FIN1101K8X" SOP50P310X90-8N 4876.13,6659.83 r180 top (schematic designator IC19)
IC19D "FIN1101K8X" SOP50P310X90-8N 4876.13,6935.43 r180 top (schematic designator IC19)
IC19E "FIN1101K8X" SOP50P310X90-8N 4876.13,7624.4 r180 top (schematic designator IC19)
IC19F "FIN1101K8X" SOP50P310X90-8N 4876.13,7899.99 r180 top (schematic designator IC19)
IC19G "FIN1101K8X" SOP50P310X90-8N 4876.13,7762.2 r180 top (schematic designator IC19)
IC19H "FIN1101K8X" SOP50P310X90-8N 4876.13,8037.79 r180 top (schematic designator IC19)
IC19I "FIN1101K8X" SOP50P310X90-8N 4876.13,7073.22 r180 top (schematic designator IC19)
IC19J "FIN1101K8X" SOP50P310X90-8N 4876.13,7348.81 r180 top (schematic designator IC19)
IC19K "FIN1101K8X" SOP50P310X90-8N 4876.13,7211.02 r180 top (schematic designator IC19)
IC19L "FIN1101K8X" SOP50P310X90-8N 4876.13,7486.61 r180 top (schematic designator IC19)
IC19M "FIN1101K8X" SOP50P310X90-8N 4876.13,8175.58 r180 top (schematic designator IC19)
IC19N "FIN1101K8X" SOP50P310X90-8N 4876.13,8451.17 r180 top (schematic designator IC19)
IC19O "FIN1101K8X" SOP50P310X90-8N 4876.13,8313.38 r180 top (schematic designator IC19)
IC19P "FIN1101K8X" SOP50P310X90-8N 4876.13,8588.97 r180 top (schematic designator IC19)
IC20A "FIN1101K8X" SOP50P310X90-8N 5063.13,6522.04 r0 top (schematic designator IC20)
IC20B "FIN1101K8X" SOP50P310X90-8N 5063.13,6797.63 r0 top (schematic designator IC20)
IC20C "FIN1101K8X" SOP50P310X90-8N 5063.13,6659.83 r0 top (schematic designator IC20)
IC20D "FIN1101K8X" SOP50P310X90-8N 5063.13,6935.43 r0 top (schematic designator IC20)
IC20E "FIN1101K8X" SOP50P310X90-8N 5063.13,7624.4 r0 top (schematic designator IC20)
IC20F "FIN1101K8X" SOP50P310X90-8N 5063.13,7899.99 r0 top (schematic designator IC20)
IC20G "FIN1101K8X" SOP50P310X90-8N 5063.13,7762.2 r0 top (schematic designator IC20)
IC20H "FIN1101K8X" SOP50P310X90-8N 5063.13,8037.79 r0 top (schematic designator IC20)
IC20I "FIN1101K8X" SOP50P310X90-8N 5063.13,7073.22 r0 top (schematic designator IC20)
IC20J "FIN1101K8X" SOP50P310X90-8N 5063.13,7348.81 r0 top (schematic designator IC20)
IC20K "FIN1101K8X" SOP50P310X90-8N 5063.13,7211.02 r0 top (schematic designator IC20)
IC20L "FIN1101K8X" SOP50P310X90-8N 5063.13,7486.61 r0 top (schematic designator IC20)
IC20M "FIN1101K8X" SOP50P310X90-8N 5063.13,8175.58 r0 top (schematic designator IC20)
IC20N "FIN1101K8X" SOP50P310X90-8N 5063.13,8451.17 r0 top (schematic designator IC20)
IC20O "FIN1101K8X" SOP50P310X90-8N 5063.13,8313.38 r0 top (schematic designator IC20)
IC20P "FIN1101K8X" SOP50P310X90-8N 5063.13,8588.97 r0 top (schematic designator IC20)
IC23 "PCF8574ADW" SOIC127P1030X265-16N 6540.35,9492.13 r90 top
IC24 "24AA025E48-I/SN" SOIC127P600X175-8N 9327.76,9584.65 r0 top
IC25 "PCF8574ADW" SOIC127P1030X265-16N 6539.37,8970.47 r90 top
IC26 "24AA025E48-I/SN" SOIC127P600X175-8N 10092.81,9577.76 r0 top
IC27 "TPS62175DQC" SON50P200X300X80-11N-R94X250 8419.6,6427.46 r180 top
J1 "" AMPHENOL_10052825-101LF 12277.56,6374.02 r90 top
J2 "" AMPHENOL_10052838-101LF 12279.08,9484.31 r90 top
J14 "" 3M_N2530-6002RB 11740.65,7743.36 r270 top
J15 "RJ45" TYCO_5406203-3 4517.72,7549.21 r90 top locked
J24 "" 3M_N2530-6002RB 11001.67,7743.33 r270 top
L2 "10uH" IND_MURATA-PS_8400 8243.11,6311.02 r270 top
LD1 "Green" LED_BIVAR_H485CGDL 4257.87,9290.35 r0 top locked
LD2 "Green" LED_BIVAR_H485CGDL 4258.27,9498.82 r0 top locked
LD3 "Green" LED_BIVAR_H485CGDL 4258.34,8872.77 r0 top locked
LD4 "Green" LED_BIVAR_H485CGDL 4258.27,9081.5 r0 top locked
LD5 "Green" LED_KINGBRIGHT_KPH-1608CGCK 4778.54,6208.66 r0 top
LD6 "Green" LED_KINGBRIGHT_KPH-1608CGCK 4778.54,6313.98 r0 top
LD7 "Green" LED_KINGBRIGHT_KPH-1608CGCK 10533.46,9696.85 r270 top
LD8 "Green" LED_KINGBRIGHT_KPH-1608CGCK 9753.94,9701.77 r270 top
M1 "Plated Hole" MTG300_600 4140.55,9718.5 r0 top
M2 "Plated Hole" MTG300_600 4139.08,6217.52 r0 top
R1 "10k" RESC1005X40N 4960.63,6208.66 r0 top
R2 "220" RESC1608X55N 5045.28,6312.01 r180 top
R3 "220" RESC1608X55N 4915.35,6313.98 r180 top
R4 "220" RESC1608X55N 10375.98,9696.85 r90 top
R5 "220" RESC1608X55N 10455.71,9697.83 r270 top
R6 "220" RESC1608X55N 9602.36,9701.77 r90 top
R7 "220" RESC1608X55N 9679.13,9701.77 r270 top
R8 "1M1" RESC2012X60N 4356.88,6215.43 r0 top
R10 "0" RESC1005X35N 11922.94,8112.23 r180 bottom
R11 "0" RESC1005X35N 11922.94,8073.13 r180 bottom
R12 "0" RESC1005X35N 11922.94,8012.84 r180 bottom
R13 "0" RESC1005X35N 11922.94,7973.76 r180 bottom
R14 "0" RESC1005X35N 11922.94,7873.02 r180 bottom
R15 "0" RESC1005X35N 11922.94,7911.8 r180 bottom
R16 "0" RESC1005X35N 11922.94,7712.66 r180 bottom
R17 "0" RESC1005X35N 11922.94,7673.29 r180 bottom
R18 "0" RESC1005X35N 11922.94,7512.85 r180 bottom
R19 "0" RESC1005X35N 11922.94,7473.48 r180 bottom
R20 "0" RESC1005X35N 11922.94,7412.89 r180 bottom
R21 "0" RESC1005X35N 11922.94,7373.09 r180 bottom
R22 "0" RESC1005X35N 11182.5,8412.93 r180 bottom
R23 "0" RESC1005X35N 11182.5,8373.56 r180 bottom
R24 "0" RESC1005X35N 11184.38,8312.78 r180 bottom
R25 "0" RESC1005X35N 11183.4,8273.41 r180 bottom
R26 "0" RESC1005X35N 11182.09,8112.48 r180 bottom
R27 "0" RESC1005X35N 11182.09,8073.11 r180 bottom
R28 "0" RESC1005X35N 11181.57,8011.24 r180 bottom
R29 "0" RESC1005X35N 11181.57,7971.82 r180 bottom
R30 "0" RESC1005X35N 11183.07,7812.01 r180 bottom
R31 "0" RESC1005X35N 11183.07,7772.64 r180 bottom
R32 "0" RESC1005X35N 11183.39,7712.86 r180 bottom
R33 "0" RESC1005X35N 11183.39,7673.49 r180 bottom
R34 "0" RESC1005X35N 11182.56,7512.42 r180 bottom
R35 "0" RESC1005X35N 11182.56,7473.77 r180 bottom
R36 "0" RESC1005X35N 11182.56,7409.88 r180 bottom
R37 "0" RESC1005X35N 11182.56,7371.06 r180 bottom
R38 "0" RESC1005X35N 8818.9,6349.41 r0 top
R39 "33" RESC1608X55N 11157.48,6630.91 r180 top
R40 "33" RESC1608X55N 10668.31,6613.68 r0 top
R41 "33" RESC1005X40N 9695.87,6375 r270 top
R42 "33" RESC1608X55N 11310.04,6659.45 r180 top
R43 "33" RESC1005X40N 11154.53,6366.14 r0 top
R44 "0" RESC1005X35N 8818.9,6384.84 r0 top
R45 "200" RESC1005X40N 11154.53,6426.18 r180 top
R46 "10k" RESC1005X40N 10668.31,6674.95 r180 top
R47 "10k" RESC1005X40N 10668.31,6491.14 r0 top
R48 "10k" RESC1005X40N 11157.48,6512.8 r0 top
R49 "10k" RESC1005X40N 11157.48,6571.85 r0 top
R50 "10k" RESC1005X40N 10668.31,6552.41 r0 top
R51 "2k7" RESC1608X55N 10668.31,6736.22 r0 top
R52 "10k" RESC1005X40N 11157.48,6689.96 r180 top
R53 "0" RESC1005X35N 10010.83,6218.5 r0 top
R54 "0" RESC1005X35N 9886.81,6301.18 r180 top
R55 "2k7" RESC1608X55N 10308.05,6549.18 r180 top
R56 "10k" RESC1005X40N 9829.7,6632.84 r180 top
R57 "10k" RESC1005X40N 8302.17,6503.94 r0 top
R58 "10k" RESC1005X40N 10527.56,6415.35 r0 top
R59 "0" RESC1005X35N 8818.9,6420.5 r0 top
R60 "0" RESC1005X35N 8818.96,6456.05 r0 top
R61 "0" RESC1005X35N 10087.6,9747.05 r0 top
R62 "10M" RESC2113X55N 6759.87,6158.81 r0 bottom
R63 "10M" RESC2113X55N 5551.37,6151.31 r180 top
R64 "0" RESC1005X35N 11921.95,8412.46 r180 bottom
R65 "0" RESC1005X35N 11921.95,8373.09 r180 bottom
R66 "0" RESC1005X35N 11922.94,8313.6 r180 bottom
R67 "0" RESC1005X35N 11922.94,8274.06 r180 bottom
R68 "0" RESC1005X35N 9998.03,9747.05 r180 top
R69 "10k" RESC1005X40N 9140.75,6741.48 r0 top
R70 "0" RESC1005X35N 9140.75,6691.84 r180 top
R71 "0" RESC1005X35N 9270.38,6872.46 r180 top
R72 "0" RESC1005X35N 8598.43,6492.13 r270 top
R89 "220" RESC1608X55N 4714.57,9212.6 r0 top
R90 "10k" RESC1005X40N 6060.04,9307.09 r0 top
R91 "220" RESC1608X55N 4714.57,9271.65 r0 top
R92 "10k" RESC1005X40N 6060.04,9357.71 r0 top
R93 "220" RESC1608X55N 4714.57,9330.71 r0 top
R94 "10k" RESC1005X40N 6060.04,9408.32 r0 top
R95 "220" RESC1608X55N 4714.57,9389.76 r0 top
R96 "10k" RESC1005X40N 6060.04,9458.94 r0 top
R97 "220" RESC1608X55N 4714.57,9448.82 r0 top
R98 "10k" RESC1005X40N 6060.04,9509.56 r0 top
R99 "220" RESC1608X55N 4714.57,9507.87 r0 top
R100 "10k" RESC1005X40N 6060.04,9560.18 r0 top
R101 "220" RESC1608X55N 4714.57,9566.93 r0 top
R102 "10k" RESC1005X40N 6060.04,9610.8 r0 top
R103 "220" RESC1608X55N 4714.57,9625.98 r0 top
R104 "10k" RESC1005X40N 6060.04,9661.42 r0 top
R105 "220" RESC1608X55N 4714.57,8740.16 r0 top
R106 "10k" RESC1005X40N 6060.04,8792.32 r0 top
R107 "220" RESC1608X55N 4714.57,8799.21 r0 top
R108 "10k" RESC1005X40N 6060.04,8842.94 r0 top
R109 "220" RESC1608X55N 4714.57,8858.27 r0 top
R110 "10k" RESC1005X40N 6060.04,8893.56 r0 top
R111 "220" RESC1608X55N 4714.57,8917.32 r0 top
R112 "10k" RESC1005X40N 6060.04,8944.18 r0 top
R113 "220" RESC1608X55N 4714.57,8976.38 r0 top
R114 "10k" RESC1005X40N 6060.04,8994.8 r0 top
R115 "220" RESC1608X55N 4714.57,9035.43 r0 top
R116 "10k" RESC1005X40N 6060.04,9045.42 r0 top
R117 "220" RESC1608X55N 4714.57,9094.49 r0 top
R118 "10k" RESC1005X40N 6060.04,9096.03 r0 top
R119 "220" RESC1608X55N 4714.57,9153.54 r0 top
R120 "10k" RESC1005X40N 6060.04,9146.65 r0 top
R121 "270k" RESC1608X55N 8429.13,6592.52 r180 top
R122 "82k" RESC1608X55N 8429.13,6525.27 r0 top
R131A "100" RESC1005X40N 4749.13,6547.2 r270 top (schematic designator R131)
R131B "100" RESC1005X40N 4749.13,6822.79 r270 top (schematic designator R131)
R131C "100" RESC1005X40N 4749.13,6684.99 r270 top (schematic designator R131)
R131D "100" RESC1005X40N 4749.13,6960.58 r270 top (schematic designator R131)
R131E "100" RESC1005X40N 4749.13,7649.56 r270 top (schematic designator R131)
R131F "100" RESC1005X40N 4749.13,7925.15 r270 top (schematic designator R131)
R131G "100" RESC1005X40N 4749.13,7787.35 r270 top (schematic designator R131)
R131H "100" RESC1005X40N 4749.13,8062.94 r270 top (schematic designator R131)
R131I "100" RESC1005X40N 4749.13,7098.38 r270 top (schematic designator R131)
R131J "100" RESC1005X40N 4749.13,7373.97 r270 top (schematic designator R131)
R131K "100" RESC1005X40N 4749.13,7236.17 r270 top (schematic designator R131)
R131L "100" RESC1005X40N 4749.13,7511.76 r270 top (schematic designator R131)
R131M "100" RESC1005X40N 4749.13,8200.74 r270 top (schematic designator R131)
R131N "100" RESC1005X40N 4749.13,8476.33 r270 top (schematic designator R131)
R131O "100" RESC1005X40N 4749.13,8338.54 r270 top (schematic designator R131)
R131P "100" RESC1005X40N 4749.13,8614.13 r270 top (schematic designator R131)
R132A "100" RESC1005X40N 5176.13,6500.04 r270 top (schematic designator R132)
R132B "100" RESC1005X40N 5176.13,6775.63 r270 top (schematic designator R132)
R132C "100" RESC1005X40N 5176.13,6637.83 r270 top (schematic designator R132)
R132D "100" RESC1005X40N 5176.13,6913.43 r270 top (schematic designator R132)
R132E "100" RESC1005X40N 5176.13,7602.4 r270 top (schematic designator R132)
R132F "100" RESC1005X40N 5176.13,7877.99 r270 top (schematic designator R132)
R132G "100" RESC1005X40N 5176.13,7740.2 r270 top (schematic designator R132)
R132H "100" RESC1005X40N 5176.13,8015.79 r270 top (schematic designator R132)
R132I "100" RESC1005X40N 5176.13,7051.22 r270 top (schematic designator R132)
R132J "100" RESC1005X40N 5176.13,7326.81 r270 top (schematic designator R132)
R132K "100" RESC1005X40N 5176.13,7189.02 r270 top (schematic designator R132)
R132L "100" RESC1005X40N 5176.13,7464.61 r270 top (schematic designator R132)
R132M "100" RESC1005X40N 5176.13,8153.58 r270 top (schematic designator R132)
R132N "100" RESC1005X40N 5176.13,8429.17 r270 top (schematic designator R132)
R132O "100" RESC1005X40N 5176.13,8291.38 r270 top (schematic designator R132)
R132P "100" RESC1005X40N 5176.13,8566.97 r270 top (schematic designator R132)
R133A "10k" RESC1005X40N 5425.2,6537.4 r90 top (schematic designator R133)
R133B "10k" RESC1005X40N 5423.23,6813.98 r90 top (schematic designator R133)
R133C "10k" RESC1005X40N 5424.21,6677.17 r90 top (schematic designator R133)
R133D "10k" RESC1005X40N 5423.23,6951.77 r90 top (schematic designator R133)
R133E "10k" RESC1005X40N 5423.23,7640.75 r90 top (schematic designator R133)
R133F "10k" RESC1005X40N 5423.23,7915.35 r90 top (schematic designator R133)
R133G "10k" RESC1005X40N 5423.23,7778.54 r90 top (schematic designator R133)
R133H "10k" RESC1005X40N 5423.23,8063.98 r90 top (schematic designator R133)
R133I "10k" RESC1005X40N 5423.23,7087.6 r90 top (schematic designator R133)
R133J "10k" RESC1005X40N 5423.23,7364.17 r90 top (schematic designator R133)
R133K "10k" RESC1005X40N 5423.23,7225.39 r90 top (schematic designator R133)
R133L "10k" RESC1005X40N 5423.23,7500.98 r90 top (schematic designator R133)
R133M "10k" RESC1005X40N 5423.23,8201.77 r90 top (schematic designator R133)
R133N "10k" RESC1005X40N 5423.23,8466.54 r90 top (schematic designator R133)
R133O "10k" RESC1005X40N 5423.23,8328.74 r90 top (schematic designator R133)
R133P "10k" RESC1005X40N 5423.23,8604.33 r90 top (schematic designator R133)
SW5 "Switch" SW_TYCO_1-1571983-0 5823.82,9484.25 r180 top
SW6 "Switch" SW_TYCO_1-1571983-0 5823.82,8969.49 r180 top
T1 "BSS138LT1G" SOT95P240X110-3N 11301.18,6378.94 r90 top
T2 "BSS138LT1G" SOT95P240X110-3N 10099.41,6263.78 r270 top
T3 "BSS138LT1G" SOT95P240X110-3N 10471.46,6526.57 r90 top
T4 "BSS138LT1G" SOT95P240X110-3N 10475.39,6297.24 r90 top
T25A "BSS138LT1G" SOT95P240X110-3N 5317.91,6516.73 r180 top (schematic designator T25)
T25B "BSS138LT1G" SOT95P240X110-3N 5316.77,6794.04 r180 top (schematic designator T25)
T25C "BSS138LT1G" SOT95P240X110-3N 5316.77,6656.24 r180 top (schematic designator T25)
T25D "BSS138LT1G" SOT95P240X110-3N 5316.77,6931.83 r180 top (schematic designator T25)
T25E "BSS138LT1G" SOT95P240X110-3N 5316.77,7620.81 r180 top (schematic designator T25)
T25F "BSS138LT1G" SOT95P240X110-3N 5316.77,7896.4 r180 top (schematic designator T25)
T25G "BSS138LT1G" SOT95P240X110-3N 5316.77,7758.61 r180 top (schematic designator T25)
T25H "BSS138LT1G" SOT95P240X110-3N 5314.96,8040.35 r180 top (schematic designator T25)
T25I "BSS138LT1G" SOT95P240X110-3N 5316.77,7069.63 r180 top (schematic designator T25)
T25J "BSS138LT1G" SOT95P240X110-3N 5316.77,7345.22 r180 top (schematic designator T25)
T25K "BSS138LT1G" SOT95P240X110-3N 5316.77,7207.43 r180 top (schematic designator T25)
T25L "BSS138LT1G" SOT95P240X110-3N 5316.77,7483.02 r180 top (schematic designator T25)
T25M "BSS138LT1G" SOT95P240X110-3N 5316.93,8175.2 r180 top (schematic designator T25)
T25N "BSS138LT1G" SOT95P240X110-3N 5316.77,8447.58 r180 top (schematic designator T25)
T25O "BSS138LT1G" SOT95P240X110-3N 5316.77,8309.79 r180 top (schematic designator T25)
T25P "BSS138LT1G" SOT95P240X110-3N 5316.77,8585.38 r180 top (schematic designator T25)

## Footprints (in the part's own frame and the unit in brackets; to place one, negate y for a bottom-side part, rotate by r counter-clockwise, add the part's x,y. Pads: shape width x height; smd on the part's side, far side on the other; paste and mask are expansions set on the pad)
3M_N2530-6002RB [mm] "30 Contacts - Straight .100\" x .100\" Low Profile Four-Wall Header"
  round 1.6 hole 1: 1(-17.78,-1.27) 2(-17.78,1.27) 3(-15.24,-1.27) 4(-15.24,1.27) 5(-12.7,-1.27) 6(-12.7,1.27) 7(-10.16,-1.27) 8(-10.16,1.27) 9(-7.62,-1.27) 10(-7.62,1.27) 11(-5.08,-1.27) 12(-5.08,1.27) 13(-2.54,-1.27) 14(-2.54,1.27) 15(0,-1.27) 16(0,1.27) 17(2.54,-1.27) 18(2.54,1.27) 19(5.08,-1.27) 20(5.08,1.27) 21(7.62,-1.27) 22(7.62,1.27) 23(10.16,-1.27) 24(10.16,1.27) 25(12.7,-1.27) 26(12.7,1.27) 27(15.24,-1.27) 28(15.24,1.27) 29(17.78,-1.27) 30(17.78,1.27)
  silkscreen extent -22.71,-4.85 22.71,4.52, body extent -22.71,-4.11 22.71,4.52, height 9.91
AMPHENOL_10052825-101LF [mm] "72 Contacts, 2mm Pitch, 6 Columns, 4 Pairs per Column, 4 Walls, Right Angle Header"
  round 1.1 hole 0.5: A1(-5,-7.65) A2(-3,-7.75) A3(-1,-7.65) A4(1,-7.75) A5(3,-7.65) A6(5,-7.75) B1(-5,-6.25) B2(-3,-6.35) B3(-1,-6.25) B4(1,-6.35) B5(3,-6.25) B6(5,-6.35) C1(-5,-4.85) C2(-3,-4.95) C3(-1,-4.85) C4(1,-4.95) C5(3,-4.85) C6(5,-4.95) D1(-5,-3.45) D2(-3,-3.55) D3(-1,-3.45) D4(1,-3.55) D5(3,-3.45) D6(5,-3.55) E1(-5,-2.05) E2(-3,-2.15) E3(-1,-2.05) E4(1,-2.15) E5(3,-2.05) E6(5,-2.15) F1(-5,-0.65) F2(-3,-0.75) F3(-1,-0.65) F4(1,-0.75) F5(3,-0.65) F6(5,-0.75) G1(-5,0.75) G2(-3,0.65) G3(-1,0.75) G4(1,0.65) G5(3,0.75) G6(5,0.65) H1(-5,2.15) H2(-3,2.05) H3(-1,2.15) H4(1,2.05) H5(3,2.15) H6(5,2.05) I1(-5,3.55) I2(-3,3.45) I3(-1,3.55) I4(1,3.45) I5(3,3.55) I6(5,3.45) J1(-5,4.95) J2(-3,4.85) J3(-1,4.95) J4(1,4.85) J5(3,4.95) J6(5,4.85) K1(-5,6.35) K2(-3,6.25) K3(-1,6.35) K4(1,6.25) K5(3,6.35) K6(5,6.25) L1(-5,7.75) L2(-3,7.65) L3(-1,7.75) L4(1,7.65) L5(3,7.75) L6(5,7.65)
  silkscreen extent -6.95,-21.95 6.95,11.85, body extent -6.95,-21.95 6.95,11.85, height 15.25
AMPHENOL_10052838-101LF [mm] "96 Contacts, 2mm Pitch, 8 Columns, 4 Pairs per Column, 4 Walls, Right Angle Header"
  round 1.1 hole 0.5: A1(-7,-7.65) A2(-5,-7.75) A3(-3,-7.65) A4(-1,-7.75) A5(1,-7.65) A6(3,-7.75) A7(5,-7.65) A8(7,-7.75) B1(-7,-6.25) B2(-5,-6.35) B3(-3,-6.25) B4(-1,-6.35) B5(1,-6.25) B6(3,-6.35) B7(5,-6.25) B8(7,-6.35) C1(-7,-4.85) C2(-5,-4.95) C3(-3,-4.85) C4(-1,-4.95) C5(1,-4.85) C6(3,-4.95) C7(5,-4.85) C8(7,-4.95) D1(-7,-3.45) D2(-5,-3.55) D3(-3,-3.45) D4(-1,-3.55) D5(1,-3.45) D6(3,-3.55) D7(5,-3.45) D8(7,-3.55) E1(-7,-2.05) E2(-5,-2.15) E3(-3,-2.05) E4(-1,-2.15) E5(1,-2.05) E6(3,-2.15) E7(5,-2.05) E8(7,-2.15) F1(-7,-0.65) F2(-5,-0.75) F3(-3,-0.65) F4(-1,-0.75) F5(1,-0.65) F6(3,-0.75) F7(5,-0.65) F8(7,-0.75) G1(-7,0.75) G2(-5,0.65) G3(-3,0.75) G4(-1,0.65) G5(1,0.75) G6(3,0.65) G7(5,0.75) G8(7,0.65) H1(-7,2.15) H2(-5,2.05) H3(-3,2.15) H4(-1,2.05) H5(1,2.15) H6(3,2.05) H7(5,2.15) H8(7,2.05) I1(-7,3.55) I2(-5,3.45) I3(-3,3.55) I4(-1,3.45) I5(1,3.55) I6(3,3.45) I7(5,3.55) I8(7,3.45) J1(-7,4.95) J2(-5,4.85) J3(-3,4.95) J4(-1,4.85) J5(1,4.95) J6(3,4.85) J7(5,4.95) J8(7,4.85) K1(-7,6.35) K2(-5,6.25) K3(-3,6.35) K4(-1,6.25) K5(1,6.35) K6(3,6.25) K7(5,6.35) K8(7,6.25) L1(-7,7.75) L2(-5,7.65) L3(-3,7.75) L4(-1,7.65) L5(1,7.75) L6(3,7.65) L7(5,7.75) L8(7,7.65)
  silkscreen extent -8.95,-21.95 8.95,11.85, body extent -8.95,-21.95 8.95,11.85, height 15.25
c130h60 [mm] "Plated Through Hole: Hole Dia.=0.6mm Pad Dia.=1.30mm"
  round 1.3 hole 0.6: 1(0,0)
  silkscreen extent -1,-1 1,1
CAPAE430X540N [mm] "Capacitor, Aluminium Electrolytric, 4.3mm L X 4.3mm W X 5.4mm H, IPC Medium Density"
  rect 2.55x1.6 smd: 1(-1.75,0) 2(1.75,0)
  silkscreen extent -2.8,-2.15 2.15,2.15, body extent -2.75,-2.25 2.75,2.25, height 5.7
CAPC1005X55N [mm] "Capacitor, Non-Polarized, Chip; 1.00mm L X 0.50mm W X 0.70mm H, IPC Medium Density"
  rect 0.62x0.62 smd: 1(-0.45,0) 2(0.45,0)
  body extent -0.52,-0.27 0.53,0.28, height 0.55
CAPC1608X87N [mm] "Chip Capacitor, Body 1.6x0.8mm IPC Medium Density"
  rect 0.95x1 smd: 1(-0.8,0) 2(0.8,0)
  body extent -0.87,-0.47 0.88,0.48, height 0.87
CAPC2012X135N [mm] "Chip Capacitor, Body 2.0x1.25mm, IPC Medium Density"
  rect 1.05x1.4 smd: 1(-0.9,0) 2(0.9,0)
  silkscreen extent 0,-0.58 0,0.58, body extent -1.05,-0.67 1.05,0.68, height 1.25
FIDUCIAL_TOP_C100-200 [mm] "Round Fiducial Target, Top Layer, 1.0mm, Top Solder 2.0mm, Keepout =2.0mm"
  round 1 smd paste-0.51 mask+0.5: FTG2(0,0)
  TopLayer keep-out circle w0.1: c0,0 r1
FIDUCIAL_TOP_S100-200 [mm] "Square Fiducial Target, Top Layer, 1.0mm, Top Solder 2.0mm, Keepout =2.0mm"
  rect 1x1 smd rot 45 paste-0.51 mask+0.5: 1(0,0)
  TopLayer keep-out region: 1.414,0 0,-1.414 -1.414,0 0,1.414
FIDUCIAL_TOP_S200-400 [mm] "Square Fiducial Target, Top Layer, 2.0mm, Top Solder 4.0mm, Keepout =4.0mm"
  rect 2x2 smd rot 45 paste-0.9 mask+1: 1(0,0)
  TopLayer keep-out region: -2.839,0.011 -0.011,2.839 2.818,0.011 -0.011,-2.818
IND_MURATA-PS_8400 [mm] "Miniature Surface Mount Power Inductors, 4.5mm L X 3.3mm W X 2.9mm H, MURATA 8400 Serie"
  rect 2x3.5 smd: 1(-1.6,0) 2(1.6,0)
  silkscreen extent -0.3,-1.8 0.3,1.8, body extent -2.4,-1.8 2.4,1.8, height 2.9
LED_BIVAR_H485CGDL [mm] "Quad-Level 2mm Green, PCB Edge Mounting  BIVAR H485CGDL"
  round 1.5 hole 0.8: 1(-3.81,-1.27) 2(-3.81,1.27) 3(-1.27,-1.27) 4(-1.27,1.27) 5(1.27,-1.27) 6(1.27,1.27) 7(3.81,-1.27) 8(3.81,1.27)
  silkscreen extent -9.99,-2.55 4.71,2.55, body extent -9.99,-2.55 4.71,2.55, height 11.3
LED_KINGBRIGHT_KPH-1608CGCK [mm] "SMT Green LED, Case 0603, Body L 1.6 x W 0.8mm H 0.65mm"
  rect 0.8x0.8 smd: 1(-0.825,0) 2(0.825,0)
  silkscreen extent -1.82,-0.4 0.08,0.4, body extent -0.8,-0.4 0.8,0.4, height 0.65
MTG300_600 [mm] "Plated Through Hole: Hole Dia.=3.0mm Pad Dia.=6.0mm"
  round 6 hole 3: 1(0,0)
RESC1005X35N [mm] "Chip Resistor, EIA 0402, Metric 1005, Body 1.0x0.5mm, IPC Medium Density"
  rect 0.58x0.62 smd: 1(-0.47,0) 2(0.47,0)
  body extent -0.52,-0.27 0.53,0.28, height 0.35
RESC1005X40N [mm] "Chip Resistor, EIA 0402, Metric 1005, Body 1.0x0.5mm, IPC Medium Density"
  rect 0.58x0.62 smd: 1(-0.47,0) 2(0.47,0)
  body extent -0.52,-0.27 0.53,0.28, height 0.4
RESC1608X55N [mm] "Chip Resistor, EIA 0603, Metric 1608, Body 1.6x0.8mm, IPC Medium Density"
  rect 0.9x1 smd: 1(-0.8,0) 2(0.8,0)
  body extent -0.87,-0.47 0.88,0.48, height 0.55
RESC2012X60N [mm] "Chip Resistor, EIA 0805, Metric 2012, Body 2.0x1.2mm, IPC Medium Density"
  rect 0.95x1.4 smd: 1(-1,0) 2(1,0)
  silkscreen extent 0,-0.55 0,0.55, body extent -1.1,-0.67 1.1,0.68, height 0.6
RESC2113X55N [mm] "Chip Resistor, EIA 0805, Metric 2113, Body 2.05x1.3mm, IPC Medium Density"
  rect 1x1.45 smd: 1(-0.95,0) 2(0.95,0)
  silkscreen extent 0,-0.55 0,0.55, body extent -1,-0.62 1,0.63, height 0.55
SOD2512X110N [mm] "Small Outline Diode (SOD-323), 1.70mm W X 1.25mm L X 1.10mm H body,  IPC Medium Density"
  rect 0.9x0.5 smd: 1(-1.3,0) 2(1.3,0)
  silkscreen extent -1.62,-0.65 0.85,0.87, body extent -1.35,-0.67 1.35,0.68, height 1.1
SOIC127P600X175-8N [mm] "SOIC 8, Pitch 1.27mm - Body 4x5mm, IPC Medium Density"
  rect 1.55x0.6 smd: 1(-2.7,1.905) 2(-2.7,0.635) 3(-2.7,-0.635) 4(-2.7,-1.905) 5(2.7,-1.905) 6(2.7,-0.635) 7(2.7,0.635) 8(2.7,1.905)
  silkscreen extent -2.52,-2.5 1.55,2.88, body extent -3.1,-2.5 3.1,2.5, height 1.75
SOIC127P1030X265-16N [mm] "SOIC 16, Pitch 1.27mm - Body 7.5x10.3mm, IPC Medium Density"
  rect 2x0.6 smd: 1(-4.65,4.445) 2(-4.65,3.175) 3(-4.65,1.905) 4(-4.65,0.635) 5(-4.65,-0.635) 6(-4.65,-1.905) 7(-4.65,-3.175) 8(-4.65,-4.445) 9(4.65,-4.445) 10(4.65,-3.175) 11(4.65,-1.905) 12(4.65,-0.635) 13(4.65,0.635) 14(4.65,1.905) 15(4.65,3.175) 16(4.65,4.445)
  silkscreen extent -5.52,-5.15 3.32,5.37, body extent -5.18,-5.25 5.18,5.25, height 1.68
SON50P200X300X80-11N-R94X250 [mm] "SON, 10-Leads, Body 2x3mm, Pitch 0.5mm, Thermal Pad 0.94x2.5mm, IPC Medium Density"
  rect 0.7x0.3 smd: 1(-1.05,1) 2(-1.05,0.5) 3(-1.05,0) 4(-1.05,-0.5) 5(-1.05,-1) 6(1.05,-1) 7(1.05,-0.5) 8(1.05,0) 9(1.05,0.5) 10(1.05,1)
  rect 0.94x2.5 smd: 11(0,0)
  silkscreen extent -1.5,-1.55 1.05,1.6, body extent -1.05,-1.55 1.05,1.55, height 0.8
SOP50P310X90-8N [mm] "SOP, 0.50mm pitch; 8 pin, 2.30mm W X 2.00mm L X 0.90mm H body, PC Medium Density"
  rect 0.85x0.3 smd: 1(-1.55,0.75) 2(-1.55,0.25) 3(-1.55,-0.25) 4(-1.55,-0.75) 5(1.55,-0.75) 6(1.55,-0.25) 7(1.55,0.25) 8(1.55,0.75)
  silkscreen extent -1.83,-1 0.8,1.52, body extent -1.62,-1 1.62,1, height 0.9
SOP65P490X109-8N [mm] "SOP, 0.65mm pitch; 8 pin,3.00mm W X 3.00mm L X 1.09mm H bodyI, PC Medium Density"
  rect 1.5x0.45 smd: 1(-2.2,0.975) 2(-2.2,0.325) 3(-2.2,-0.325) 4(-2.2,-0.975) 5(2.2,-0.975) 6(2.2,-0.325) 7(2.2,0.325) 8(2.2,0.975)
  silkscreen extent -2.82,-1.5 1.12,1.82, body extent -2.45,-1.55 2.45,1.55, height 1.09
SOP65P640X110-14N [mm] "SOP, 14-Leads, Body 4.4x5mm (max), Pitch 0.65mm, IPC Medium Density"
  rect 1.45x0.45 smd: 1(-2.9,1.95) 2(-2.9,1.3) 3(-2.9,0.65) 4(-2.9,0) 5(-2.9,-0.65) 6(-2.9,-1.3) 7(-2.9,-1.95) 8(2.9,-1.95) 9(2.9,-1.3) 10(2.9,-0.65) 11(2.9,0) 12(2.9,0.65) 13(2.9,1.3) 14(2.9,1.95)
  silkscreen extent -3.48,-2.5 1.85,2.82, body extent -3.12,-2.55 3.12,2.55, height 1.1
SOT65P210X110-6N [mm] "SOT363, SC70-6, SOT, 0.65mm Pitch, 6 Pin, 1.25mm W X 2.00mm L X 1.10mm H, IPC Medium Density"
  rect 0.95x0.4 smd: 1(-1.1,0.65) 2(-1.1,0) 3(-1.1,-0.65) 4(1.1,-0.65) 5(1.1,0) 6(1.1,0.65)
  silkscreen extent -1.42,-1 0.3,1.48, body extent -1.2,-1.1 1.2,1.1, height 1.1
SOT95P240X110-3N [mm] "SOT23 3-Leads, Pitch 0.95mm, Body 1.3x2.9mm, IPC Medium Density"
  rect 1.05x0.65 smd: 1(-1.15,0.95) 2(-1.15,-0.95) 3(1.15,0)
  silkscreen extent -1.52,-1.45 0.3,1.92, body extent -1.25,-1.5 1.25,1.5, height 1.1